# Altium PCB draft2.PcbDoc (part 1 of 2)
Units mm, origin at the board's own origin, x right, y up, seen from the top; angles counter-clockwise.
Board outline 152.4 x 101.6 mm, 2 copper layers (Top Layer, Bottom Layer); 122 components, 129 nets, 542 pads, 17 vias.
Unrouted connection lines stored in the file: 308.
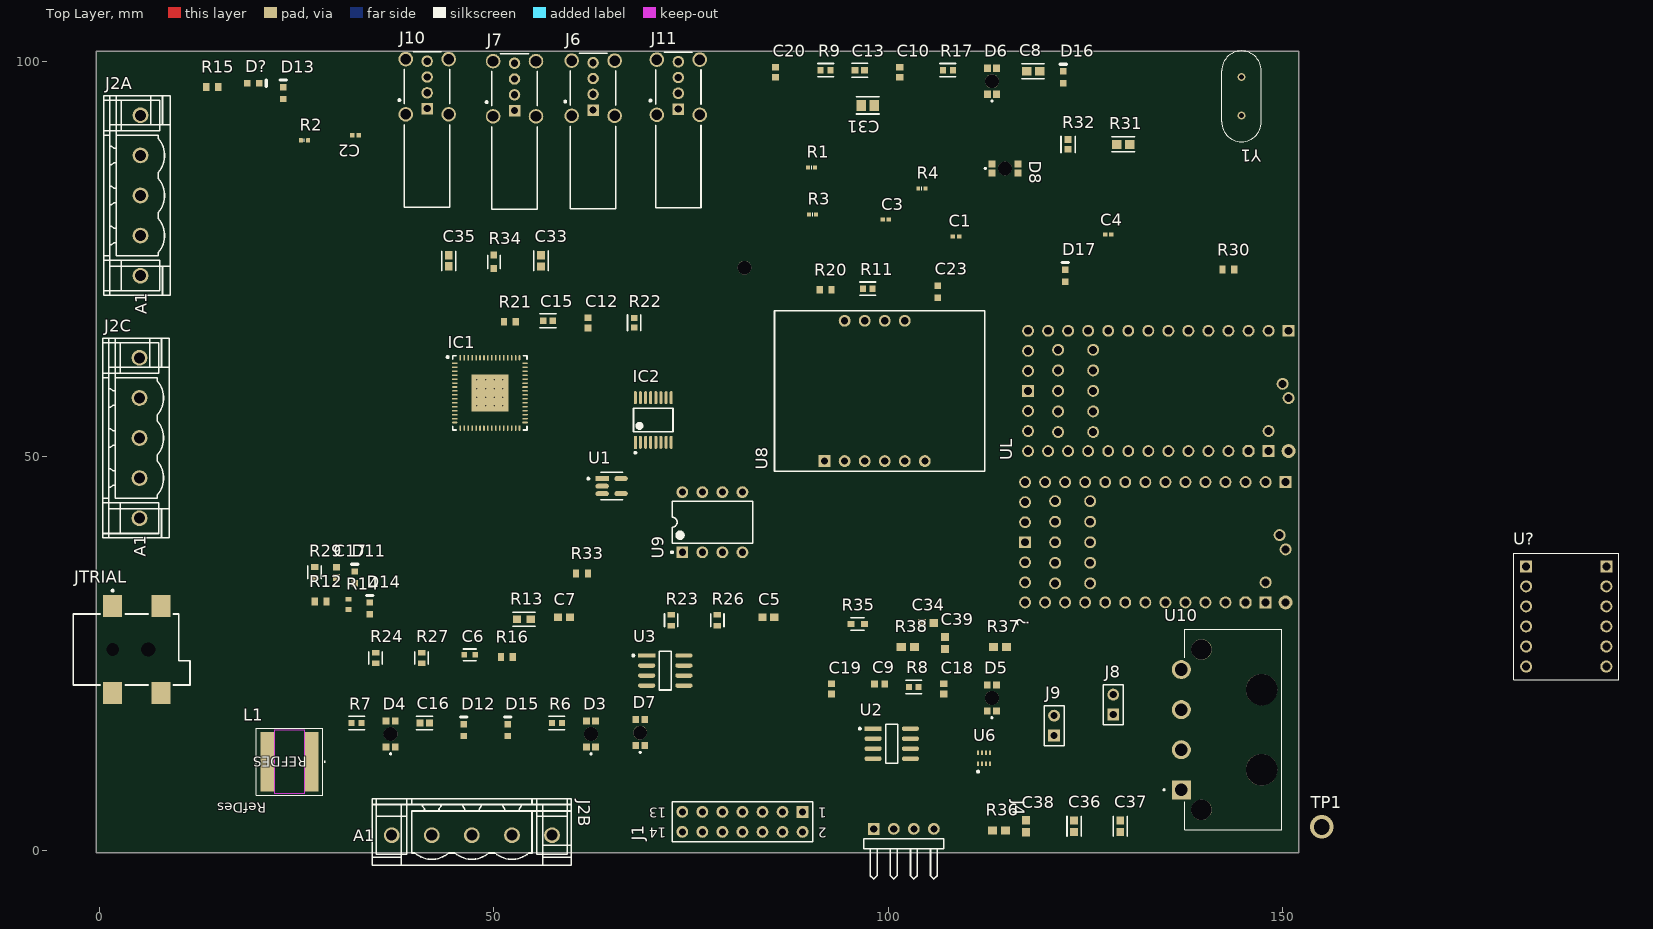
[diagram p0: Top Layer view]
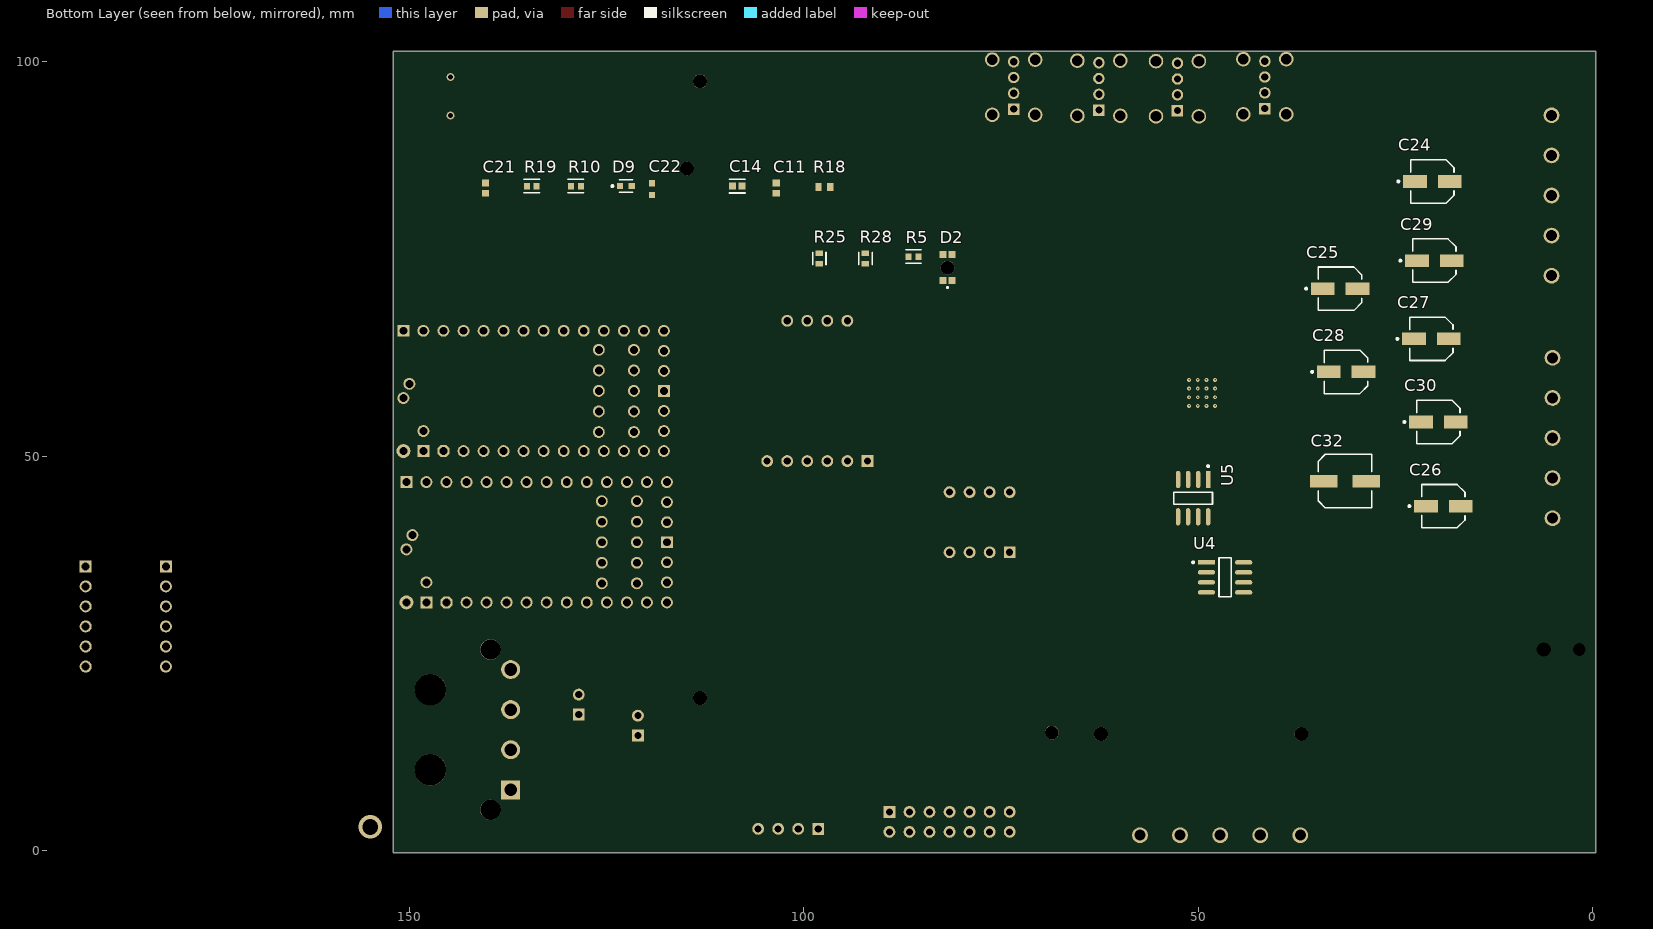
[diagram p1: Bottom Layer view, seen from below]

## Layer stack, top to bottom
Top Solder: solder mask 0.0102, Solder Resist, Dk 3.5
Top Layer: signal copper 0.0356
Dielectric 1: dielectric 0.32, FR-4, Dk 4.8
Bottom Layer: signal copper 0.0356
Bottom Solder: solder mask 0.0102, Solder Resist, Dk 3.5

## Board outline
-0.381,-0.254 152.019,-0.254 152.019,101.346 -0.381,101.346

## Design rules (kind name [scope] priority, off if disabled: settings)
Clearance [All] p1: gap=0.254 ignorepadtopadclearanceinfootprint=FALSE except(0.048: SMDPad-Region; 0.178: SMDPad-SMDPad)
PolygonConnect [All] p1: connectstyle=Relief reliefconductorwidth=0.254 reliefentries=4 polygonreliefangle="90 Angle" airgapwidth=0.254
RoutingVias [All] p1: holewidth=0.711 width=1.27 viastyle="Through Hole" minholewidth=0.711 minwidth=1.27 maxholewidth=0.711 maxwidth=1.27
SolderMaskExpansion [All] p1: expansion=0.102 istentingtop=FALSE
SupplyNets "Schematic Supply Nets_4" [InNet('+3.3')] p1: voltage=0.000
SupplyNets "Schematic Supply Nets" [InNet('GND')] p2: voltage=0.000
SupplyNets "Schematic Supply Nets_3" [InNet('12V')] p3: voltage=0.000
SupplyNets "Schematic Supply Nets_2" [InNet('5V')] p4: voltage=0.000
SupplyNets "Schematic Supply Nets_1" [InNet('5V_ESC')] p5: voltage=0.000
Width [All] p1: maxlimit=0.254 minlimit=0.254 preferedwidth=0.254
30 further rules are at their usual default settings.

## Classes and differential pairs
component class U_MSub: ? U?
component class "U_L Subsys1": UL
component class U_InterfaceBoard: C1 C2 C3 C4 J6 J7 J10 J11 R1 R2 R3 R4
component class "U_5ch Receiver": U10
component class Root: J1 J2A J2B J2C J4 JTRIAL
component class Designator: C5 C6 C7 C8 C9 C10 C11 C12 C13 C14 C15 C16 C17 C18 C19 C20 C21 C22 C23 C24 C25 C26 C27 C28 C29 C30 D2 D3 D4 D5 D6 D7 D8 D9 D11 D12 D13 D14 D15 D16 D? IC1 R5 R6 R7 R8 R9 R10 R11 R12 R13 R14 R15 R16 R17 R18 R19 R20 R21 R22 R23 R24 R25 R26 R27 R28 R29 U1 U2 U3 U4 U5 Y1
component class "5V Regulator": C33 C34 C35 C36 C37 C38 C39 L1 R34 R35 R36 R37 R38 U6

## Components (designator, comment, footprint, x,y, rotation, side; value= is the part's Value field where it differs from the comment)
? "Teensy 4.0 device including POGO pins for pins 24 - 33, but not yet pins for D+ and D-.  Symbol layout is what works for me and may not suite everyone... that can be added or additional symbols can be created to be used in a modilied davie name." TEENSY40 133.858,39.116 r180 top (schematic designator UM)
C1 "Capacitor 0.1 uF +/- 5% 16 V 0402" CAPC1005X56X25LL10T15 108.594,77.851 r0 top value=100nF
C2 "Capacitor 0.1 uF +/- 5% 16 V 0402" CAPC1005X56X25LL10T15 32.503,90.678 r180 top value=100nF
C3 "Capacitor 0.1 uF +/- 5% 16 V 0402" CAPC1005X56X25LL10T15 99.686,80.01 r0 top value=100nF
C4 "Capacitor 0.1 uF +/- 5% 16 V 0402" CAPC1005X56X25LL10T15 127.889,78.105 r0 top value=100nF
C5 "Capacitor 1 uF +/- 10% 16 V 0603" CAPC1608X94X35NL15T15 84.826,29.612 r0 top value=1µF
C6 "2.2u" FP-C1608-080-0_1-MFG 46.98,24.841 r0 top
C7 "Capacitor 1 uF +/- 10% 16 V 0603" CAPC1608X94X35NL15T15 58.918,29.612 r0 top value=1µF
C8 "1u" FP-0603-L_1_6_0_15-W_0_81-IPC_A 118.364,98.806 r0 top
C9 "0.1 u" CAPC1608X90X35LL15T15 98.923,21.158 r0 top
C10 "0.1 u" CAPC1608X90X35LL15T15 101.473,98.679 r90 top
C11 "0.1 u" CAPC1608X90X35LL15T15 103.495,83.998 r90 bottom
C12 "0.1 u" CAPC1608X90X35LL15T15 61.976,66.929 r90 top
C13 "1 u" FP-0603-L_1_6_0_15-W_0_8-IPC_C 96.393,98.933 r0 top
C14 "1 u" FP-0603-L_1_6_0_15-W_0_8-IPC_C 108.448,84.252 r180 bottom
C15 "1 u" FP-0603-L_1_6_0_15-W_0_8-IPC_C 56.896,67.183 r0 top
C16 "1 u" FP-0603-L_1_6_0_15-W_0_8-IPC_C 41.265,16.205 r0 top
C17 "0.1 u" CAPC1608X90X35LL15T15 30.099,35.306 r90 top
C18 "0.1 u" CAPC1608X90X35LL15T15 107.051,20.523 r90 top
C19 "0.1 u" CAPC1608X90X35LL15T15 92.827,20.523 r90 top
C20 "0.1 u" CAPC1608X90X35LL15T15 85.725,98.679 r90 top
C21 "0.1 u" CAPC1608X90X35LL15T15 140.325,83.998 r90 bottom
C22 "33pF" WCAP-CSGP_0603_L1.6W0.8H0.8_Reflow 119.243,83.871 r90 bottom
C23 "33pF" WCAP-CSGP_0603_L1.6W0.8H0.8_Reflow 106.299,70.866 r90 top
C24 "150uF" FP-OS-CON-SMT-B6-MFG 20.361,84.836 r180 bottom
C25 "150uF" FP-OS-CON-SMT-B6-MFG 32.045,71.247 r180 bottom
C26 "150uF" FP-OS-CON-SMT-B6-MFG 18.964,43.688 r180 bottom
C27 "150uF" FP-OS-CON-SMT-B6-MFG 20.488,64.897 r180 bottom
C28 "150uF" FP-OS-CON-SMT-B6-MFG 31.283,60.706 r180 bottom
C29 "150uF" FP-OS-CON-SMT-B6-MFG 20.107,74.803 r180 bottom
C30 "150uF" FP-OS-CON-SMT-B6-MFG 19.599,54.356 r180 bottom
C31 "GCM21BR71C155KA37L" FP-GCM21B-0_15-IPC_B 97.409,94.488 r180 top
C32 "UUD1A151MCL1GS" NIC-CAPA2-6.3X5.8_V 31.41,46.863 r180 bottom
C33 "22uF" FP-0603-L_1_6_0_2-W_0_8_0-IPC_B 56.007,74.779 r90 top
C34 "0.1 uF" CAPC1608X90X35NL15T15 105.029,28.888 r0 top
C35 "1uF" FP-0603-L_1_6_0_15-W_0_8-IPC_B 44.323,74.779 r90 top
C36 "22uF" FP-0603-L_1_6_0_2-W_0_8_0-IPC_B 123.571,3.13 r90 top
C37 "22uF" FP-0603-L_1_6_0_2-W_0_8_0-IPC_B 129.413,3.13 r90 top
C38 "10 pF" CAPC1608X90X35NL15T15 117.475,3.13 r90 top
C39 "6.8nF" CAPC1608X90X35NL15T15 107.188,26.348 r90 top
D2 "156125YV73000" "WL-SBRW_1205_reverse mount" 81.788,73.914 r90 bottom
D3 "156125YV73000" "WL-SBRW_1205_reverse mount" 62.347,14.808 r90 top
D4 "156125YV73000" "WL-SBRW_1205_reverse mount" 36.947,14.808 r90 top
D5 "156125YV73000" "WL-SBRW_1205_reverse mount" 113.147,19.38 r90 top
D6 "156125YV73000" "WL-SBRW_1205_reverse mount" 113.157,97.536 r90 top
D7 "156125YV73000" "WL-SBRW_1205_reverse mount" 68.58,14.986 r90 top
D8 "156125YV73000" "WL-SBRW_1205_reverse mount" 114.808,86.487 r0 top
D9 "RED" FP-SML-LX0603SIW-TR-MFG 122.545,84.252 r180 bottom
D11 "RED" LTST-C191KRKT_V 32.385,34.671 r90 top
D12 "RED" LTST-C191KRKT_V 46.218,15.316 r90 top
D13 "RED" LTST-C191KRKT_V 23.358,96.033 r90 top
D14 "RED" LTST-C191KRKT_V 34.29,30.734 r90 top
D15 "RED" LTST-C191KRKT_V 51.806,15.316 r90 top
D16 "RED" LTST-C191KRKT_V 122.174,98.044 r90 top
D17 "RED" LTST-C191KRKT_V 122.428,72.898 r90 top
D? "RED" LTST-C191KRKT_V 19.548,97.303 r0 top (schematic designator DX)
IC1 "USB2517-JZX" MCHP-QFN-64-4700X4700TP_L 49.53,58.039 r0 top
IC2 "74LVC157APW,118" FP-SOT403-1-IPC_B 70.231,54.61 r90 top
J1 "Header 7X2" HDR2X7 89.154,4.953 r180 top
J2A "1147920000" SL_5_08HC_180LF_03 4.826,83.058 r90 top
J2B "1147920000" SL_5_08HC_180LF_03 47.244,2.413 r0 top
J2C "1147920000" SL_5_08HC_180LF_03 4.699,52.324 r90 top
J4 "Header 4H" HDR1X4H 98.171,2.794 r0 top
J6 "73725-0110BLF" FCI-73725-0110BLF_V 62.611,96.655 r0 top
J7 "73725-0110BLF" FCI-73725-0110BLF_V 52.652,96.591 r0 top
J8 "Conn_01x02" HDR1X2 128.524,17.272 r90 top
J9 "Conn_01x02" HDR1X2 121.031,14.605 r90 top
J10 "73725-0110BLF" FCI-73725-0110BLF_V 41.582,96.845 r0 top
J11 "73725-0110BLF" FCI-73725-0110BLF_V 73.406,96.782 r0 top
JTRIAL "PJ-002AH-SMT-TR" CUI-PJ-002AH-4_V 4.123,25.527 r0 top
L1 "10uH" IND_TAIYO_NR8040_TAY 24.13,11.303 r180 top
R1 "Resistor 330R +/-5 % 0402 63 mW" RESC0402(1005)_L 90.297,86.614 r0 top value=330
R2 "Resistor 330R +/-5 % 0402 63 mW" RESC0402(1005)_L 26.035,90.043 r0 top value=330
R3 "Resistor 330R +/-5 % 0402 63 mW" RESC0402(1005)_L 90.424,80.645 r0 top value=330
R4 "Resistor 330R +/-5 % 0402 63 mW" RESC0402(1005)_L 104.267,83.947 r0 top value=330
R5 "330" FP-CRGCQ0603-IPC_C 86.106,75.311 r180 bottom value=330Ω
R6 "330" FP-CRGCQ0603-IPC_C 58.029,16.205 r0 top value=330Ω
R7 "330" FP-CRGCQ0603-IPC_C 32.629,16.205 r0 top value=330Ω
R8 "330" FP-CRGCQ0603-IPC_C 103.241,20.777 r0 top value=330Ω
R9 "330" FP-CRGCQ0603-IPC_C 92.075,98.933 r0 top value=330Ω
R10 "330" FP-CRGCQ0603-IPC_C 128.895,84.252 r180 bottom value=330Ω
R11 "330" FP-CRGCQ0603-IPC_C 97.409,71.247 r0 top value=330Ω
R12 "Resistor 10k +/-1% 0603 100 mW" RESC1608X55X25ML10T15 28.067,31.623 r0 top value=10k
R13 "1M" FP-AC0603-IPC_A 53.838,29.358 r0 top
R14 "12K 1%" RESC1608X55X25LL10T15 31.623,31.242 r90 top
R15 "Resistor 100k +/-1% 0603 100 mW" RESC1608X55X25ML10T15 14.341,96.795 r0 top value=100k
R16 "Resistor 100k +/-1% 0603 100 mW" RESC1608X55X25ML10T15 51.679,24.587 r0 top value=100k
R17 "10K" FP-CRGCQ0603-IPC_C 107.569,98.933 r0 top value=10KΩ
R18 "Resistor 10k +/-1% 0603 100 mW" RESC1608X55X25ML10T15 97.399,84.125 r180 bottom value=10k
R19 "330" FP-CRGCQ0603-IPC_C 134.483,84.252 r180 bottom value=330Ω
R20 "Resistor 10k +/-1% 0603 100 mW" RESC1608X55X25ML10T15 92.075,71.12 r0 top value=10k
R21 "100k" RESC1608X55X25ML10T15 52.07,67.056 r0 top
R22 "1M" FP-CRGP0603-IPC_C 67.818,66.929 r90 top
R23 "330 ohm" FP-MCT0603-MFG 72.507,29.231 r90 top
R24 "330 ohm" FP-MCT0603-MFG 35.042,24.46 r90 top
R25 "330 ohm" FP-MCT0603-MFG 98.044,75.057 r90 bottom
R26 "330 ohm" FP-MCT0603-MFG 78.349,29.231 r90 top
R27 "330 ohm" FP-MCT0603-MFG 40.884,24.46 r90 top
R28 "330 ohm" FP-MCT0603-MFG 92.202,75.057 r90 bottom
R29 "330 ohm" FP-MCT0603-MFG 27.305,35.306 r90 top
R30 "Resistor 1k +/-1% 0603 100 mW" RESC1608X55X25ML10T15 143.129,73.66 r0 top value=1k
R31 "ERA-3AEB183V" FP-ERA3A-IPC_A 129.794,89.535 r0 top
R32 "ERA3AEB202V" FP-ERA3A-IPC_C 122.809,89.535 r90 top
R33 "Resistor 100k +/-1% 0603 100 mW" RESC1608X55X25ML10T15 61.202,35.179 r0 top value=100k
R34 "20" FP-RT0603-MFG 50.038,74.652 r90 top value=604KΩ
R35 "604k" FP-RT0603-MFG 96.139,28.761 r0 top value=604KΩ
R36 "40.2k" RESC1609X55X30ML10T20 114.046,2.599 r0 top
R37 "15k" RESC1609X55X30ML10T20 114.173,25.84 r0 top
R38 "7.7k" RESC1609X55X30ML10T20 102.489,25.84 r0 top
TP1 "TestPoint" "Test Point" 154.94,3.048 r0 top
U1 "AP2112K-3.3TRG1" FP-SOT25-IPC_A 64.955,46.228 r0 top
U2 "MIC2026-1YM-TR" FP-SOICN-8LD-PL-1-IPC_B 100.457,13.589 r0 top
U3 "MIC2026-1YM-TR" FP-SOICN-8LD-PL-1-IPC_B 71.755,22.86 r0 top
U4 "MIC2026-1YM-TR" FP-SOICN-8LD-PL-1-IPC_B 46.62,34.671 r180 bottom
U5 "MIC2026-1YM-TR" FP-SOICN-8LD-PL-1-IPC_B 50.673,44.704 r270 bottom
U6 "MP-2393" MP-2393 111.395,11.046 r0 top
U8 "SI" "BNO055 Adafruit Breakout" 91.948,49.403 r90 top
U9 "LM358AP" P0008A 77.724,41.656 r90 top
U10 "TR" TE_641737-1 139.7,15.367 r90 top
U? "BOB-12009" CONV_BOB-12009 185.928,29.718 r0 top
UL "DEV-16771" TEENSY40 134.239,58.293 r180 top
Y1 "ABL-24.000MHZ-B2" XTAL_HC49P488W46L1150T500H350 144.78,95.631 r270 top

## Footprints (in the part's own frame and the unit in brackets; to place one, negate y for a bottom-side part, rotate by r counter-clockwise, add the part's x,y. Pads: shape width x height; smd on the part's side, far side on the other; paste and mask are expansions set on the pad)
"BNO055 Adafruit Breakout" [mm] "Made based off KiCAD footprint used previously- 0.1\" pitch and 0.7\" between rows"
  rect 1.5x1.5 hole 0.9: 1(0,0)
  round 1.5 hole 0.9: 2(0,-2.54) 3(0,-5.08) 4(0,-7.62) 5(0,-10.16) 6(0,-12.7) 7(17.78,-10.16) 8(17.78,-7.62) 9(17.78,-5.08) 10(17.78,-2.54)
  silkscreen extent -1.27,-20.32 19.05,6.35
CAPC1005X56X25LL10T15 [mm] "Chip Capacitor, 2-Leads, Body 1.10x0.60mm, IPC High Density"
  rect 0.58x0.54 smd: 1(-0.39,0) 2(0.39,0)
  body extent -0.55,-0.3 0.55,0.3, height 0.56
CAPC1608X90X35LL15T15 [mm] "Chip Capacitor, 2-Leads, Body 1.60x0.81mm, IPC High Density"
  rect 0.85x0.9 smd: 1(-0.65,0) 2(0.65,0)
  body extent -0.88,-0.48 0.87,0.48, height 0.9
CAPC1608X90X35NL15T15 [mm] "Chip Capacitor, 2-Leads, Body 1.60x0.81mm, IPC Medium Density"
  rect 1.05x1 smd: 1(-0.75,0) 2(0.75,0)
  body extent -0.88,-0.48 0.87,0.48, height 0.9
CAPC1608X94X35NL15T15 [mm] "Chip Capacitor, 2-Leads, Body 1.75x0.96mm, IPC Medium Density"
  rect 1.05x1 smd: 1(-0.75,0) 2(0.75,0)
  body extent -0.87,-0.48 0.87,0.48, height 0.94
CONV_BOB-12009 [mil]
  round 60 hole 40: GND_1(200,-50) GND_2(-200,-50) HV(200,50) HV2(200,150) HV3(200,-150) HV4(200,-250) LV(-200,50) LV2(-200,150) LV3(-200,-150) LV4(-200,-250)
  rect 60x60 / inner round 60 / far side rect 60x60 hole 40: HV1(200,250) LV1(-200,250)
  silkscreen extent -262,-316 262,316, body extent -262,-316 262,316, height 110
CUI-PJ-002AH-4_V [mm] "SMD, 4-Leads, Body 14.8x9 mm, Pitch 6.1mm"
  rect 2.4x2.8 smd: 1(-2.4,5.5) 1(3.7,5.5) 2(-2.4,-5.5) 3(3.7,-5.5)
  round 0 hole 1.6: MH1(-2.4,0)
  round 0 hole 1.8: MH2(2.1,0)
  silkscreen extent -7.4,-4.5 7.4,7.57, body extent -7.4,-6.3 7.4,6.3, height 11.2
FCI-73725-0110BLF_V [mm] "THD, 4-Leads, Body 19.7x5.76mm, Pitch 2mm"
  rect 1.45x1.45 hole 0.92: 1(0,-2.77)
  round 1.45 hole 0.92: 2(0,-0.77) 3(0,1.23) 4(0,3.23)
  round 1.85 hole 1.35: 5(-2.72,-3.5) 6(2.72,-3.5) 7(2.72,3.5) 8(-2.72,3.5)
  silkscreen extent -3.65,-15.26 2.88,4.44, body extent -2.88,-15.26 2.88,4.44, height 13.83
FP-0603-L_1_6_0_2-W_0_8_0-IPC_B [mm]
  rect 1.058x1.012 smd paste+0 mask+0: 1(-0.727,0) 2(0.727,0)
  silkscreen extent -1.26,-0.91 1.26,0.91, body extent -1.51,-0.76 1.51,0.76, height 0.25
FP-0603-L_1_6_0_15-W_0_8-IPC_B [mm]
  rect 1.058x0.962 smd paste+0 mask+0: 1(-0.702,0) 2(0.702,0)
  silkscreen extent -1.23,-0.88 1.23,0.88, body extent -1.48,-0.73 1.48,0.73, height 0.25
FP-0603-L_1_6_0_15-W_0_8-IPC_C [mm]
  rect 0.858x0.862 smd paste+0 mask+0: 1(-0.602,0) 2(0.602,0)
  silkscreen extent -1.03,-0.87 1.03,0.87, body extent -1.13,-0.58 1.13,0.58, height 0.25
FP-0603-L_1_6_0_15-W_0_81-IPC_A [mil]
  rect 47.5x42.06 smd paste+0 mask+0: 1(-32.51,0) 2(32.51,0)
  silkscreen extent -56,-37 56,37, body extent -76,-41 76,41, height 10
FP-AC0603-IPC_A [mm]
  rect 1.059x1.012 smd paste+0 mask+0: 1(-0.877,0) 2(0.877,0)
  silkscreen extent -1.41,-0.91 1.41,0.91, body extent -1.91,-1.01 1.91,1.01, height 0.25
FP-C1608-080-0_1-MFG [mm]
  rect 0.7x0.7 smd paste+0 mask+0: 1(-0.7,0) 2(0.7,0)
  silkscreen extent -0.8,-0.75 0.8,0.75, body extent -1.15,-0.55 1.15,0.55, height 0.25
FP-CRGCQ0603-IPC_C [mm]
  rect 0.758x0.812 smd paste+0 mask+0: 1(-0.627,0) 2(0.627,0)
  silkscreen extent -1.01,-0.85 1.01,0.85, body extent -0.8,-0.4 0.8,0.4, height 0.55
FP-CRGP0603-IPC_C [mm]
  rect 0.758x0.812 smd paste+0 mask+0: 1(-0.627,0) 2(0.627,0)
  silkscreen extent -1.01,-0.85 1.01,0.85, body extent -1.11,-0.55 1.11,0.55, height 0.25
FP-ERA3A-IPC_A [mm]
  rect 1.255x1.106 smd paste+0 mask+0: 1(-0.826,0) 2(0.826,0)
  silkscreen extent -1.45,-0.95 1.45,0.95, body extent -1.95,-1.05 1.95,1.05, height 0.25
FP-ERA3A-IPC_C [mm]
  rect 0.855x0.906 smd paste+0 mask+0: 1(-0.626,0) 2(0.626,0)
  silkscreen extent -1.05,-0.9 1.05,0.9, body extent -1.15,-0.6 1.15,0.6, height 0.25
FP-GCM21B-0_15-IPC_B [mm]
  rect 1.206x1.408 smd paste+0 mask+0: 1(-0.826,0) 2(0.826,0)
  silkscreen extent -1.43,-1.1 1.43,1.1, body extent -1.68,-0.95 1.68,0.95, height 0.25
FP-MCT0603-MFG [mm]
  rect 0.7x0.95 smd paste+0 mask+0: 1(-0.675,0) 2(0.675,0)
  silkscreen extent -0.8,-0.85 0.8,0.85, body extent -1.12,-0.58 1.12,0.58, height 0.25
FP-OS-CON-SMT-B6-MFG [mm]
  rect 3x1.6 smd paste+0 mask+0: 1(-2.2,0) 2(2.2,0)
  silkscreen extent -4.43,-2.75 2.75,2.75, body extent -3,-2.65 3,2.65, height 6
FP-RT0603-MFG [mm]
  rect 0.9x0.8 smd paste+0 mask+0: 1(-0.85,0) 2(0.85,0)
  silkscreen extent -0.85,-0.81 0.86,0.8, body extent -1.4,-0.55 1.4,0.55, height 0.25
FP-SML-LX0603SIW-TR-MFG [mm]
  rect 0.8x0.8 smd paste+0 mask+0: 1(-0.75,0) 2(0.75,0)
  silkscreen extent -1.85,-0.8 0.86,0.8, body extent -0.8,-0.4 0.8,0.4, height 0.73
FP-SOICN-8LD-PL-1-IPC_B [mm]
  rect 2.184x0.567 smd paste+0 mask+0: 1(-2.361,1.905)
  rrect100% 2.184x0.567 smd paste+0 mask+0: 2(-2.361,0.635) 3(-2.361,-0.635) 4(-2.361,-1.905) 5(2.361,-1.905) 6(2.361,-0.635) 7(2.361,0.635) 8(2.361,1.905)
  silkscreen extent -4.17,-2.46 0.77,2.46, body extent -3.7,-2.72 3.7,2.72, height 0.25
FP-SOT25-IPC_A [mm]
  rect 1.707x0.616 smd paste+0 mask+0: 1(-1.201,0.95)
  rrect100% 1.707x0.616 smd paste+0 mask+0: 2(-1.201,0) 3(-1.201,-0.95) 4(1.201,-0.95) 5(1.201,0.95)
  silkscreen extent -3.08,-1.75 1.4,1.75, body extent -2.55,-2 2.55,2, height 0.25
FP-SOT403-1-IPC_B [mm]
  rect 1.655x0.381 smd paste+0 mask+0: 1(-2.825,2.275)
  rrect100% 1.655x0.381 smd paste+0 mask+0: 2(-2.825,1.625) 3(-2.825,0.975) 4(-2.825,0.325) 5(-2.825,-0.325) 6(-2.825,-0.975) 7(-2.825,-1.625) 8(-2.825,-2.275) 9(2.825,-2.275) 10(2.825,-1.625) 11(2.825,-0.975) 12(2.825,-0.325) 13(2.825,0.325) 14(2.825,0.975) 15(2.825,1.625) 16(2.825,2.275)
  silkscreen extent -4.28,-2.5 1.5,2.5, body extent -3.9,-2.75 3.9,2.75, height 0.25
HDR1X2 [mm] "Connector; Header; 2 Position"
  rect 1.5x1.5 hole 0.9: 1(0,0)
  round 1.5 hole 0.9: 2(2.54,0)
  silkscreen extent -1.27,-1.27 3.81,1.27
HDR1X4H [mm] "Connector; Header; 4 Position; Right Angle"
  rect 1.5x1.5 hole 0.9: 1(0,0)
  round 1.5 hole 0.9: 2(2.54,0) 3(5.08,0) 4(7.62,0)
  silkscreen extent -1.27,-6.35 8.89,-1.27
HDR2X7 [mm] "Connector; Header; 7x2 Position"
  rect 1.5x1.5 hole 0.9: 1(0,0)
  round 1.5 hole 0.9: 2(0,2.54) 3(2.54,0) 4(2.54,2.54) 5(5.08,0) 6(5.08,2.54) 7(7.62,0) 8(7.62,2.54) 9(10.16,0) 10(10.16,2.54) 11(12.7,0) 12(12.7,2.54) 13(15.24,0) 14(15.24,2.54)
  silkscreen extent -1.27,-1.27 16.51,3.81
IND_TAIYO_NR8040_TAY [mil]
  rect 70.5x295 smd paste+0 mask+0: 1(-110.25,0) 2(110.25,0)
  Top Layer keep-out region: -73,-159.5 -73,159.5 73,159.5 73,-159.5
  silkscreen extent -178,-167 167,167, body extent -161,-162 161,162, height 165
LTST-C191KRKT_V [mm] "SMD, 2-Leads, Body 1.6x0.8mm"
  rect 0.8x0.8 smd: 1(-0.75,0) 2(0.75,0)
  silkscreen extent 1.65,-0.4 1.65,0.4, body extent -0.8,-0.4 0.8,0.4, height 0.9
MCHP-QFN-64-4700X4700TP_L [mm] "QFN, 64-Leads, Body 9.1x9.1mm, Pitch 0.5mm, Thermal Pad 4.7x4.7mm, IPC High Density"
  oval 0.7x0.2 smd: 1(-4.45,3.75) 2(-4.45,3.25) 3(-4.45,2.75) 4(-4.45,2.25) 5(-4.45,1.75) 6(-4.45,1.25) 7(-4.45,0.75) 8(-4.45,0.25) 9(-4.45,-0.25) 10(-4.45,-0.75) 11(-4.45,-1.25) 12(-4.45,-1.75) 13(-4.45,-2.25) 14(-4.45,-2.75) 15(-4.45,-3.25) 16(-4.45,-3.75) 33(4.45,-3.75) 34(4.45,-3.25) 35(4.45,-2.75) 36(4.45,-2.25) 37(4.45,-1.75) 38(4.45,-1.25) 39(4.45,-0.75) 40(4.45,-0.25) 41(4.45,0.25) 42(4.45,0.75) 43(4.45,1.25) 44(4.45,1.75) 45(4.45,2.25) 46(4.45,2.75) 47(4.45,3.25) 48(4.45,3.75)
  oval 0.2x0.7 smd: 17(-3.75,-4.45) 18(-3.25,-4.45) 19(-2.75,-4.45) 20(-2.25,-4.45) 21(-1.75,-4.45) 22(-1.25,-4.45) 23(-0.75,-4.45) 24(-0.25,-4.45) 25(0.25,-4.45) 26(0.75,-4.45) 27(1.25,-4.45) 28(1.75,-4.45) 29(2.25,-4.45) 30(2.75,-4.45) 31(3.25,-4.45) 32(3.75,-4.45) 49(3.75,4.45) 50(3.25,4.45) 51(2.75,4.45) 52(2.25,4.45) 53(1.75,4.45) 54(1.25,4.45) 55(0.75,4.45) 56(0.25,4.45) 57(-0.25,4.45) 58(-0.75,4.45) 59(-1.25,4.45) 60(-1.75,4.45) 61(-2.25,4.45) 62(-2.75,4.45) 63(-3.25,4.45) 64(-3.75,4.45)
  rect 4.7x4.7 smd: 65(0,0)
  silkscreen extent -5.47,-4.7 4.7,4.7, body extent -4.55,-4.55 4.55,4.55, height 1
MP-2393 [mm] "https://www.monolithicpower.com/en/documentview/productdocument/index/version/2/document_type/Datasheet/lang/en/sku/MP2393GTL-Z/document_id/4270/"
  rect 0.25x0.6 smd: 1(0,0) 2(0.5,0) 3(1,0) 4(1.5,0) 5(1.5,1.4) 6(1,1.4) 7(0.5,1.4) 8(0,1.4)
  silkscreen extent -0.12,-1.12 0.13,-0.88
NIC-CAPA2-6.3X5.8_V [mm] "Aluminum Electrolytic Capacitor, Diameter 6.3mm, Height 6.1mm, Pitch 5.4mm"
  rect 3.5x1.6 smd: 1(-2.7,0) 2(2.7,0)
  silkscreen extent -3.4,-3.4 3.4,3.4, body extent -3.15,-3.15 3.15,3.15, height 6.1
P0008A [mm] "DIP, 8-Leads, Body 10.15x6.6mm, Pitch 2.54mm"
  rect 1.5x1.5 hole 0.9: 1(-3.81,3.81)
  round 1.5 hole 0.9: 2(-3.81,1.27) 3(-3.81,-1.27) 4(-3.81,-3.81) 5(3.81,-3.81) 6(3.81,-1.27) 7(3.81,1.27) 8(3.81,3.81)
  silkscreen extent -3.93,-5.1 2.65,5.23, body extent -3.95,-5.07 3.95,5.07, height 5.08
RESC0402(1005)_L [mm] "Chip Resistor, Body 1.0x0.5mm, IPC High Density"
  rrect25% 0.5x0.55 smd: 1(-0.45,0) 2(0.45,0)
  silkscreen extent 0,-0.2 0,0.2, body extent -0.5,-0.25 0.5,0.25, height 0.3
RESC1608X55X25LL10T15 [mm] "Chip Resistor, 2-Leads, Body 1.60x0.80mm, IPC High Density"
  rect 0.6x0.8 smd: 1(-0.65,0) 2(0.65,0)
  body extent -0.85,-0.45 0.85,0.45, height 0.55
RESC1608X55X25ML10T15 [mm] "Chip Resistor, 2-Leads, Body 1.70x0.90mm, IPC Low Density"
  rect 0.8x1 smd: 1(-0.75,0) 2(0.75,0)
  body extent -0.85,-0.45 0.85,0.45, height 0.55
RESC1609X55X30ML10T20 [mm] "Chip Resistor, 2-Leads, Body 1.60x0.85mm, IPC Low Density"
  rect 1.15x1.05 smd: 1(-0.825,0) 2(0.825,0)
  body extent -0.85,-0.48 0.85,0.48, height 0.55
SL_5_08HC_180LF_03 [mm] "OMNIMATE Signal - Serie BL/SL 5.08  SL 5.08HC/03/180LF 3.2"
  round 2 hole 1.4: 0(-10.16,-0.42) 0(10.16,-0.42) A1(-5.08,-0.42) A2(0,-0.42) A3(5.08,-0.42)
  silkscreen extent -12.62,-4.22 12.62,4.21, body extent -12.62,-4.22 12.62,4.21, height 12.01
TE_641737-1 [mil]
  rect 94.5x94.5 / inner round 94.5 / far side rect 94.5x94.5 hole 63: 1(-300,100)
  round 94.5 hole 63: 2(-100,100) 3(100,100) 4(300,100)
  round 102 hole 102 unplated: ""(-400,0) ""(400,0)
  round 157 hole 157 unplated: ""(-200,-300) ""(200,-300)
  silkscreen extent -500,-401 500,191, body extent -500,-431 500,131, height 345
TEENSY40 [mm]
  round 1.508 hole 1: 0-RX1(-13.97,-7.62) 1-TX1(-11.43,-7.62) 2-OUT2(-8.89,-7.62) 3-LRCLK2(-6.35,-7.62) 3V3-2(16.51,-2.54) 4-BCLK2(-3.81,-7.62) 5-IN2(-1.27,-7.62) 6-OUT1D(1.27,-7.62) 7-RX2/OUT1A(3.81,-7.62) 8-TX2/IN1(6.35,-7.62) 9-OUT1C(8.89,-7.62) 10-CS/MQSR(11.43,-7.62) 11-MOSI/CTX1(13.97,-7.62) 12-MIO/MQSL(16.51,-7.62) 13-SCK/CRX1/LED(16.51,7.62) 14-A0/TX3/S-PFI_OUT(13.97,7.62) 15-A1/RX3/S-PDIF_IN(11.43,7.62) 16-A2/RX4/SCL1(8.89,7.62) 17-A3/TX4/SDA1(6.35,7.62) 18-A4/SDA0(3.81,7.62) 19-A5/SCL0(1.27,7.62) 20-A6/TX5/LRCLK1(-1.27,7.62) 21-A7/RX5/BCLK1(-3.81,7.62) 22-A8/CTX1(-6.35,7.62) 23-A9/CRX1/CCLK1(-8.89,7.62) 24-A10/TX6/SCL2(12.7,5.207) 25-A11/SDA2(8.255,5.207) 26-A12/MOSI1(12.7,2.604) 27-A13/SCK1(8.255,2.604) 28-RX7(12.7,0) 29-TX7(8.255,0) 30-CRX3(12.7,-2.603) 31-CTX3(8.255,-2.603) 32-OUTB1(12.7,-5.207) 33-MCLK2(8.255,-5.207) D+(-15.75,-0.9) D-(-16.51,0.9) ON/OFF(16.51,5.08) PROGRAM(16.51,2.54) VBAT(16.51,-5.08) VUSB(-13.97,5.08)
  oct 1.508x1.508 / inner round 1.393 / far side oct 1.508x1.508 hole 1: 3V3-1(-11.43,7.62)
  rect 1.508x1.508 / inner round 1.393 / far side rect 1.508x1.508 hole 1: GND1(-16.51,-7.62) GND2(16.51,0) GND3(-13.97,7.62)
  round 1.778 hole 1: VIN(-16.51,7.62)
"Test Point" [mm] "Used same size as kicad - 3mm, 2mm hole"
WCAP-CSGP_0603_L1.6W0.8H0.8_Reflow [mm] "Ceramic Capacitors, body 1.6x0.8mm"
  rect 0.8x0.8 smd: 1(-0.75,0) 2(0.75,0)
  body extent -0.8,-0.4 0.8,0.4, height 0.8
"WL-SBRW_1205_reverse mount" [mm] "SMD Bi-color Reverse mount Waterclear, body 3.2x1.2mm"
  rect 0.9x0.85 smd: 1(-1.65,0.575) 2(-1.65,-0.575) 3(1.65,-0.575) 4(1.65,0.575)
  round 1.75 hole 1.75 unplated: MH1(0,0)
  silkscreen extent -2.6,-0.1 -2.4,0.1, body extent -1.6,-0.6 1.6,0.6, height 0.28
XTAL_HC49P488W46L1150T500H350 [mm]
  round 1.007 hole 0.657: 1(-2.44,0) 2(2.44,0)
  silkscreen extent -5.75,-2.5 5.75,2.5

## Part data
? UL: library part TEENSY40, DeviceSetName=TEENSY40, GateName_1=G$1, LibraryName=TEENSYV1, Package=TEENSY40, SymbolName_1=TEENSY40
C1 C2 C3 C4: library part CMP-001-00001-6, "Chip Capacitor, 0.1 uF, +/- 5%, 16 V, 0402 (1005 Metric)", Capacitor Type=Ceramic, Case/Package=0402, Max Operating Temperature=125°C, Min Operating Temperature=-55°C, Tolerance=5%, Voltage Rating=16V, Mounting Technology=SM, Pins=2, RoHS Compliant=True
C5 C7: library part CMP-001-00003-6, "Chip Capacitor, 1 uF, +/- 10%, 16 V, 0603 (1608 Metric)", Capacitor Type=Ceramic, Case/Package=0603, Max Operating Temperature=125°C, Min Operating Temperature=-55°C, Tolerance=10%, Voltage Rating=16V, Mounting Technology=SM, Pins=2, RoHS Compliant=True
C6: library part CMP-08246-003049-1, "Multilayer Ceramic Capacitors 2.2μF ±10% 25V X5R SMD 0603", Capacitance=2.2uF, Case Code (Imperial)=0603, Case Code (Metric)=1608, Dielectric=X5R, Dielectric Material=Ceramic, Max Operating Temperature=85°C, Min Operating Temperature=-55°C, Package Quantity=4000, Tolerance=10%, Voltage Rating=25V, Case/Package=0603, Depth=0.8mm, Height=0.8mm, Lead Free="Lead Free", Length=1.6mm, Mount="Surface Mount", Packaging="Tape and Reel", Radiation Hardening=No, REACH SVHC="No SVHC", Resistor Type=Ceramic, RoHS Compliant=Yes, Series=C, Termination=SMD/SMT, Thickness=0.035inch, Voltage Rating (DC)=25V, Weight=7.1E-05oz, Width=0.031inch
C8: library part CMP-2006-04474-2, "General Purpose Ceramic Capacitor, 0603, 1uF, 10%, X5R, 15%, 6.3V", Capacitance=1uF, Case Code (Imperial)=0603, Case Code (Metric)=1608, Dielectric=X5R, Insulation Resistance=100GR, Max Operating Temperature=85°C, Min Operating Temperature=-55°C, Package Quantity=1, Tolerance=10%, Voltage=6.3V, Case/Package=0603, Construction=Flat, Contact Plating=Tin, Depth=0.81mm, Dissipation Factor=5%, Height=0.9mm, Lead Free="Lead Free", Length=1.6mm, Mount="Surface Mount", Number of Pins=2, Packaging="Tape and Reel", Radiation Hardening=No, REACH SVHC="No SVHC", RoHS Compliant=Yes, Series=-, Termination=SMD/SMT, Thickness=0.035inch, Voltage Rating=6.3V, Voltage Rating (DC)=6.3V, Width=0.032inch
C9 C10 C11 C12 C17 C18 C19 C20 C21: library part CMP-2006-04390-1, "06035C104KAT4A", Manufacturer="AVX Interconnect / Elco", Part Number=06035C104KAT4A
C13 C14 C15 C16: library part CMP-2000-07531-4, "Ceramic Capacitor General Use 1uF ±10% 50V X7R 0603 / UMK107AB7105KA-T", Capacitance=1uF, Case Code (Imperial)=0603, Case Code (Metric)=1608, Dielectric=X7R, Max Operating Temperature=125°C, Min Operating Temperature=-55°C, Package Quantity=1, Tolerance=10%, Voltage Rating=50V, Case/Package=0603, Construction=Flat, Depth=0.8mm, Halogen Free="Halogen Free", Height=0.8mm, Length=1.6mm, Mount="Surface Mount", Packaging="Tape and Reel", Radiation Hardening=No, RoHS Compliant=Yes, Series=M, Termination=SMD/SMT, Thickness=0.037inch, Voltage Rating (DC)=50V, Width=0.031inch
C22 C23: library part CMP-03913-65419545-2, "Ceramic Capacitor 33pF, 16VDC, 0603, ±5 %", Case Code (Imperial)=0603, Case Code (Metric)=1608, Insulation Resistance=10GΩ, Max Operating Temperature=125°C, Min Operating Temperature=-55°C, Tolerance=5%, Voltage Rating=16V, Capacitance=33pF, Case/Package=0603, Height=800µm, Length=1.6mm, Mount="Surface Mount", Packaging="Cut Tape", RoHS=Compliant, Thickness=863.6µm, Voltage Rating (DC)=16V, Width=800µm
C24 C25 C26 C27 C28 C29 C30: library part CMP-05428-000017-2, "Conductive Polymer Aluminum Solid Capacitors (OS-CON) 150uF ±20% 6.3V", Case/Package=Radial, ESR (Equivalent Series Resistance)=12mR, Leakage Current=500uA, Max Operating Temperature=105°C, Min Operating Temperature=-55°C, Package Quantity=1500, Ripple Current=3.52A, Tolerance=20%, Voltage=6.3V, Capacitance=150uF, Diameter=5mm, Dissipation Factor=12%, Height=5.9mm, Height - Seated (Max)=0.236inch, Lead Free="Lead Free", Length=5.9mm, Life (Hours)=2000Hour, Mount="Surface Mount", Number of Pins=6, Packaging="Tape and Reel", Polarity=Polar, REACH SVHC="No SVHC", Ripple Current (AC)=3.52A, RoHS Compliant=Yes, Series="OS-CON™, SVPE", Termination=SMD/SMT, Voltage Rating=6.3V, Voltage Rating (DC)=6.3V
C31: library part CMP-2007-03337-2, "Ceramic Capacitor for Automotive 1.5uF ±10% 16VDC X7R 0805 Embossed T/R", Capacitance=1.5uF, Case Code (Imperial)=0805, Case Code (Metric)=2012, Dielectric=X7R, Max Operating Temperature=125°C, Min Operating Temperature=-55°C, Package Quantity=3000, Ratings=AEC-Q200, Tolerance=10%, Voltage Rating=16V, Case/Package=0805, Depth=1.25mm, Height=1.25mm, Length=2mm, Mount="Surface Mount", Packaging="Tape and Reel", Radiation Hardening=No, Termination=SMD/SMT, Thickness=0.055inch, Voltage Rating (DC)=16V, Width=0.049inch
C32: library part CMP-0687-00052-1, "Aluminum Electrolytic Capacitor, UD Series, Low Impedance, 150 uF, 10 V, + / - 20%, -55 to 105 degC, Chip Type, 6.3 x 5.8 mm D x L, Pb-Free, Reel", Manufacturer=Nichicon, Rated Capacitance="150 uF", Rated Ripple Current (at 100kHz)="230 mA", Rated Voltage="10 V", Tolerance Rated Capacitance="-20 to 20%", ComponentLink1Description="Manufacturer URL", ComponentLink1URL=http://www.nichicon.co.jp/, ComponentLink2Description=Datasheet, ComponentLink2URL=http://products.nichicon.co.jp/en/pdf/XJA043/e-ud.pdf, ComponentLink3Description="Package Specification", ComponentLink3URL=http://products.nichicon.co.jp/en/pdf/XJA043/e-ud.pdf, DatasheetVersion=08/2012, Diameter="6.3 mm", Endurance Time="2000 h", Impedance="0.44 Ohm", Length="5.8 mm", Mounting Technology="Surface Mount", PackageDescription="2-Pin Surface Mount Device, Diameter 6.3 mm, Height 5.8 mm, Pitch 5.4 mm", PackageReference=CAPAE-D6.3H5.8, Packing="Dia382mm Reel", PartNumber=UUD1A151MCL1GS, RoHS=TRUE
C33 C36 C37: library part CMP-14477-000010-3, "0603", Case Code (Metric)=1608, Max Operating Temperature=85°C, Min Operating Temperature=-55°C, Tolerance=20%, Voltage Rating=10V, Capacitance=22uF, Case Code (Imperial)=0603, Case/Package=0603, Mount="Surface Mount", Packaging="Cut Tape", RoHS Compliant=Yes
C34 C38 C39: library part CMP-2006-02157-1, "0603 (1608 metric)", Manufacturer="AVX Interconnect / Elco", Part Number=LD033C104KAB2A
C35: library part CMP-14477-003841-2, "None", Case/Package=0603, Max Operating Temperature=125°C, Min Operating Temperature=-55°C, Ratings=AEC-Q200, Tolerance=20%, Voltage Rating=25V, Capacitance=1uF, Length=0.063inch, Mount="Surface Mount", Packaging="Tape and Reel", RoHS Compliant=Yes, Thickness=0.037inch, Width=0.031inch
D2 D3 D4 D5 D6 D7 D8: library part CMP-03913-90235601-1, "156125YV73000 Dual Color LED, Yellow/bright Green, Water Clear, 1.2mm", Forward Current=40mA, Forward Voltage=2V, Max Operating Temperature=85°C, Max Reverse Voltage (DC)=5V, Min Operating Temperature=-40°C, Dominant Wavelength=571nm, Height=800µm, Length=3.2mm, Luminous Intensity=50mcd, NexarPartId=90235601, Packaging="Tape and Reel", Peak Wavelength=573nm, RoHS=Compliant, Viewing Angle=120°, Width=1.2mm
D9: library part CMP-57192-000009-1, "LED RED DIFFUSED SMD", Case Code (Imperial)=0603, Case Code (Metric)=1608, Color=Red, Forward Current=20mA, Forward Voltage=2V, Lens Color=White, Max Operating Temperature=85°C, Min Operating Temperature=-25°C, Package Quantity=1, Power Rating=50mW, Approvals=UL, Case/Package=0603, Dominant Wavelength=636nm, Height=0.6mm, Illumination Color=Red, Lead Free="Lead Free", Length=1.6mm, Lens Style=Diffused, Lens Transparency=Diffused, Luminous Intensity=60mcd, Moisture Sensitivity Level=2, Mount="Surface Mount", Number of LEDs=1, Number of Pins=2, Packaging="Tape and Reel", REACH SVHC="No SVHC", RoHS Compliant=Yes, Test Current=20mA, Viewing Angle=140°, Wavelength=636nm, Width=0.8mm
D11 D12 D13 D14 D15 D16 D17 D?: library part CMP-007-00024-2, "LED Uni-Color Red, 62.5 mW, 25 mA, -30 to 85 degC, 2-Pin SMD, RoHS, Tape and Reel", Case/Package=0603, Colour=Red, Forward Current=20mA, Forward Voltage=2V, Manufacturer=Lite-On, Max Operating Temperature=85°C, Min Operating Temperature=-55°C, Package Description="2-Pin Surface Mount Device, Body 1.6 x 0.8 mm", Package Quantity=3000, Package Reference=C191KRKT, Power=75mW, Datasheet URL=http://optoelectronics.liteon.com/upload/download/DS-22-99-0151/S_110_LTST-C190KRKT.pdf, Datasheet Version="Rev. F, 05/2013", Illumination Colour=Red, Lens Style=Diffused, Luminous Intensity=54mcd, Manufacturer URL=http://www.us.liteon.com/, Mounting Technology=SM, Nominal Vf=2V, Packaging=TapeandReel, Pins=2, RoHS Compliant=True, Viewing Angle=130degrees
IC1: library part CMP-0186-00330-1, "USB 2.0 Hi-Speed 7-Port Hub Controller, 3 to 3.6 V, 0 to 70 degC, 64-Pin QFN, RoHS, Tape and Reel", Manufacturer=Microchip, Op Voltage="3.3 V", Operating Temperature="0 to 70 degC", Voltage Regulator="1.8 V", ComponentLink1Description="Manufacturer URL", ComponentLink1URL=http://www.microchip.com/, ComponentLink2Description=Datasheet, ComponentLink2URL=http://ww1.microchip.com/downloads/en/DeviceDoc/2517.pdf, ComponentLink3Description="Package Specification", ComponentLink3URL=http://ww1.microchip.com/downloads/en/DeviceDoc/2517.pdf, DatasheetVersion="Rev. 2.8", Downstream Ports=7, MGMT I/F=I2C, Mounting Technology="Surface Mount", MultiTRAK Tech=TRUE, PackageDescription="64-Pin Plastic Quad Flat No Lead Package, Body 9 x 9 mm, Pitch 0.5 mm", PackageReference=QFN-64, Packing=TRAY, PartNumber=USB2517-JZX, RoHS=TRUE, Upstream Port="USB 2.0", USB Speed="High Speed"
IC2: library part CMP-14348-000002-1, "IC QUAD 2-IN MUX 16-TSSOP"
J1: library part CMP-002-00362-2, "Header, 7-Pin, Dual row", Component Type=Standard, Design Item ID="Header 7X2", LatestRevisionDate=17-Jul-2002, LatestRevisionNote="Re-released for DXP Platform.", Pins=14, Publisher="Altium Limited", Source="Miscellaneous Connectors.SchLib"
J2A J2B J2C: library part CMP-1559-01007-1, "OMNIMATE Signal - series BL/SL 5.08", Colour=Orange, Manufacturer=Weidmueller, Rated_current_use_group_B_UL_1059="16 A", Rated_voltage_for_surge_voltage_class_pollution_degree_II_2="400 V", Rated_voltage_use_group_B_UL_1059="300 V", UL_94_flammability_rating=V-0, ComponentLink1Description="Manufacturer URL", ComponentLink1URL=http://www.weidmueller.com/, ComponentLink2Description="URL Link1", ComponentLink2URL=http://catalog.weidmueller.com/catalog/Start.do?localeId=en&ObjectID=1147920000, Contact_material=Cu-Leg, Contact_surface=tinned, Insulating_material="PA GF", Mounting_onto_the_PCB="Solder connection", No_of_poles=3, Outgoing_elbow=180°, PackageReference=SL_5_08HC_180LF_03, Packaging=Box, PartNumber=1147920000, Pitch_inch="0.2 inch", Pitch_mm="5.08 mm", Qty="100 PCS", Revision=V1, Short_text_for_material="SL 5.08HC/03/180LF 3.2SN OR BX", Side_termination_characteristic="Solder flange", Solder_pin_length_mm="3.2 mm"
J4: "Header, 4-Pin, Right Angle", LatestRevisionDate=17-Jul-2002, LatestRevisionNote="Re-released for DXP Platform.", Publisher="Altium Limited"
J6 J7 J10 J11: library part CMP-2000-05674-1, "USB-A 2.0 Receptacle Connector, RA, -40 to 85 degC, 4-Pin THD, RoHS, Tube", Color=White, Flammability Rating=UL94V-0, Manufacturer=FCI, Package Description="4-Pin Throug Hole Device, Body 19.7 x 5.76 mm, Pitch 2 mm", Brand=FCI, Connector Type=USBTypeAReceptacle,Upright, Contact Material=CopperAlloy, Contact Plating=PalladiumNickelAlloy(GXT), Datasheet URL=http://portal.fciconnect.com/Comergent//fci/drawing/73725.pdf, Datasheet Version="Rev. AH, 09/2015", Factory Pack Quantity=30, Features=Singlestack,nobackshield,withoutsensorcontact, Gender=Female, Manufacturer URL=http://portal.fciconnect.com/, Mounting Angle=Right, Mounting Style=ThroughHole, Mounting Technology=ThroughHole, Number of Contacts=4, Number of Ports=1, Number of Positions=4, Number of Positions / Contacts=4, Package Reference=73725-0110BLF, Packaging=Tube, Product=USBTypeAConnectors, Product Category=USBConnectors, RoHS=Details, Series=USB, Shell Plating=Tin, Standard=USB2.0, Termination Style=SolderPin
JTRIAL: library part CMP-2000-06896-2, "DC Power Jack, Right Angle, -25 to 85 degC, 4-Pin 14.8 x 9 x 11 mm SMD, RoHS, Tape and Reel", Current Rating=5A, Flammability Rating=UL94V-0, Insulation Resistance=100MOhms, Manufacturer=CUIInc., Operating Temperature Range=-25Cto+85C, Package Description="4-Pin Surface Mount Device, Body 14.8 x 9 mm, Pitch 6.1 mm", Package Reference=PJ-002AH, Voltage Rating=24V, Brand=CUI, Connector Type=DCPowerJack, Contact Gender=Male, Contact Material=Brass, Contact Plating=Nickel, Datasheet URL=http://www.cui.com/product/resource/pj-002ah-smt.pdf, Datasheet Version="Rev. 1.03, 11/2012", Factory Pack Quantity=350, Housing Material=Polyamide(PA), Inside Contact Diameter=2mm, Manufacturer URL=http://www.cui.com/, Mounting Angle=Right, Mounting Style=SMD/SMT, Mounting Technology=SurfaceMount, Outside Contact Diameter=6.5mm, Packaging=Reel, PartNumber=PJ-002AH, Product=Jacks, Product Category=DCPowerConnectors, RoHS=True, Termination Style=SMD/SMT
L1: library part NR8040T100M, "No Description Available", Manufacturer_Name="TAIYO YUDEN", Copyright="Copyright (C) 2025 Ultra Librarian. All rights reserved.", Manufacturer_Part_Number=NR8040T100M
R1 R2 R3 R4: library part CMP-009-00132-3, "Chip Resistor, 330 Ohms, +/-5 %, 63 mW, -55 to 155 degC, 0402", Case/Package=0402, Max Operating Temperature=155°C, Min Operating Temperature=-55°C, Power=63mW, Tolerance=5%, Pins=2
R5 R6 R7 R8 R9 R10 R11 R19: library part CMP-03211-002147-1, "CRGCQ 0603 330R 5%", Ambient Temperature Range High=+70°C, Manufacturer="TE Connectivity", Manufacturer Part Number=CRGCQ0603J330R, Package=CRGCQ0603, Power Rating=0.1W, Resistance=330Ω, Temperature="-55°C to +155°C", Temperature Coefficient=±100ppm/°C, Temperature Range High=+155°C, Temperature Range Low=-55°C, Tolerance=0.05, Voltage Rating=75V, Category=Res, ComponentLink2Description=Datasheet, ComponentLink2URL=https://www.te.com/commerce/DocumentDelivery/DDEController?Action=showdoc&DocId=Data+Sheet%7F1773204-3%7F1%7Fpdf%7FEnglish%7FENG_DS_1773204-3_1.pdf%7F4-2176339-581, Composition="Thick Film", Device Class L1="Passive Components", Device Class L2=Resistors, Device Class L3="Chip SMD Resistors", Digikey Description="CRGCQ 0603 330R 5%", Height=0.55mm, Ipc Land Pattern Name=RESC16080X45, Lead Free=Yes, Mouser Description="Res General Purpose Thick Film 0603 330 Ohm 5% 1/10W ±100ppm/°C Molded Paper T/R", Octopart=https://octopart.com/crgcq0603j330r-te+connectivity-91018118, RoHS=TRUE, Series=CRGCQ
R12 R18 R20: library part CMP-009-00017-5, "Chip Resistor, 10 KOhm, +/- 1%, 01 W, -55 to 155 degC, 0603 (1608 Metric)", Case/Package=0603, Max Operating Temperature=155°C, Min Operating Temperature=-55°C, Power=100mW, Tolerance=1%, Voltage Rating=50V, Mounting Technology=SM, Pins=2, RoHS Compliant=True
R13: library part CMP-03412-038630-1, "RES 1MΩ 1.00% 0.1W 0603", Case/Package=0603, Resistance=1MR, Tolerance=1%, RoHS Compliant=Yes
R14: library part CMP-2000-04198-1, Manufacturer=Yageo, Part Number=RC0603FR-1312KL
R15 R16 R21 R33: library part CMP-009-00023-5, "Chip Resistor, 100 KOhm, +/- 1%, 0.1 W, -55 to 155 degC, 0603 (1608 Metric)", Case/Package=0603, Max Operating Temperature=155°C, Min Operating Temperature=-55°C, Power=100mW, Tolerance=1%, Voltage Rating=50V, Mounting Technology=SM, Pins=2, RoHS Compliant=True
R17: library part CMP-03211-009884-1, "CRGCQ 0603 10K 5%", Ambient Temperature Range High=+70°C, Manufacturer="TE Connectivity", Manufacturer Part Number=CRGCQ0603J10K, Package=CRGCQ0603, Power Rating=0.1W, Resistance=10KΩ, Temperature="-55°C to +155°C", Temperature Coefficient=±100ppm/°C, Temperature Range High=+155°C, Temperature Range Low=-55°C, Tolerance=0.05, Voltage Rating=75V, Category=Res, ComponentLink2Description=Datasheet, ComponentLink2URL=https://www.te.com/commerce/DocumentDelivery/DDEController?Action=showdoc&DocId=Data+Sheet%7F1773204-3%7F1%7Fpdf%7FEnglish%7FENG_DS_1773204-3_1.pdf%7F4-2176339-923, Composition="Thick Film", Device Class L1="Passive Components", Device Class L2=Resistors, Device Class L3="Chip SMD Resistors", Digikey Description="CRGCQ 0603 10K 5%", Height=0.55mm, Ipc Land Pattern Name=RESC16080X45, Lead Free=Yes, Mouser Description="Res Thick Film 0603 10K Ohm 5% 0.1W(1/10W) ±100ppm/C Pad SMD Automotive T/R", Octopart=https://octopart.com/crgcq0603j10k-te+connectivity-91018097, RoHS=TRUE, Series=CRGCQ
R22: library part CMP-03211-004384-3, "RES 1M OHM 1% 1/4W 0603", Case Code (Imperial)=0603, Case Code (Metric)=1608, Max Operating Temperature=155°C, Max Power Dissipation=250mW, Min Operating Temperature=-55°C, Resistance=1MR, Resistor Type="Thick Film", Temperature Coefficient=100ppm/°C, Tolerance=1%, Case/Package=0603, Number of Terminations=2, Packaging="Cut Tape", RoHS Compliant=Yes
R23 R24 R25 R26 R27 R28 R29: library part CMP-02407-004102-1, "RES SMD 100 OHM 1% 1/8W 0603", Case/Package=0603, Max Operating Temperature=125°C, Min Operating Temperature=-55°C, Power Rating=100mW, Resistance=330R, Temperature Coefficient=25ppm/°C, Tolerance=0.5%, Composition="Thin Film", Contact Plating=Tin, Depth=0.85mm, Height=0.45mm, Lead Free="Lead Free", Length=1.55mm, Military Standard=Not, Mount="Surface Mount", Packaging="Tape and Reel", Radiation Hardening=No
R30: library part CMP-009-00014-5, "Chip Resistor, 1 KOhm, +/-1%, 0.1 W, -55 to 155 degC, 0603 (1608 Metric)", Case/Package=0603, Max Operating Temperature=155°C, Min Operating Temperature=-55°C, Power=100mW, Tolerance=1%, Voltage Rating=50V, Mounting Technology=SM, Pins=2, RoHS Compliant=True
R31: library part CMP-2000-00938-2, "RES SMD 18K OHM 0.1% 1/10W 0603", Case Code (Imperial)=0603, Case Code (Metric)=1608, Max Operating Temperature=155°C, Max Power Dissipation=100mW, Min Operating Temperature=-55°C, Package Quantity=1, Resistance=18kR, Resistance Tolerance=0.1%, Resistor Type="Thin Film", Temperature Coefficient=25ppm/°C, Voltage Rating=75V, Case/Package=0603, Construction=Rectangular, Contact Plating=Tin, Depth=0.8mm, Features="Automotive AEC-Q200", Height=0.45mm, Lead Free="Lead Free", Length=1.6mm, Military Standard=Not, Mount="Surface Mount", Number of Pins=2, Number of Terminations=2, Packaging="Tape and Reel", Power Rating=100mW, Radiation Hardening=No, REACH SVHC="No SVHC", RoHS Compliant=Yes, Series=ERA-3A, Size Code=0603, Technology="METAL FILM", Termination=SMD/SMT, Tolerance=0.1%, Voltage Rating (DC)=75V, Width=0.8mm
R32: library part CMP-2000-00945-2, "RES SMD 2K OHM 0.1% 1/10W 0603", Case Code (Imperial)=0603, Case Code (Metric)=1608, Max Operating Temperature=155°C, Max Power Dissipation=100mW, Min Operating Temperature=-55°C, Package Quantity=5000, Resistance=2kR, Resistance Tolerance=0.1%, Resistor Type="Thin Film", Temperature Coefficient=25ppm/°C, Voltage Rating=75V, Case/Package=0603, Construction=Rectangular, Contact Plating=Tin, Depth=0.8mm, Height=0.45mm, Lead Free="Lead Free", Length=1.6mm, Military Standard=Not, Mount="Surface Mount", Number of Pins=2, Number of Terminations=2, Packaging="Tape and Reel", Power Rating=100mW, Radiation Hardening=No, REACH SVHC="No SVHC", RoHS Compliant=Yes, Series=ERA-3A, Technology="THIN FILM", Termination=SMD/SMT, Tolerance=0.1%, Voltage Rating (DC)=75V, Width=0.8mm, Working Voltage=75V
R34 R35: library part CMP-03412-028997-1, "RES SMD 604K OHM 1% 1/10W 0603", Manufacturer=Yageo, Manufacturer Part Number=RT0603FRE07604KL, Package=RT0603, Power Rating=0.1W, Resistance=604KΩ, Temperature="-55°C to +155°C", Temperature Coefficient="50 ppm/°C", Temperature Range High=+155°C, Temperature Range Low=-55°C, Tolerance=0.01, Voltage Rating=75V, Automotive=No, Category=Res, ComponentLink2Description=Datasheet, ComponentLink2URL=http://www.yageo.com/documents/recent/PYu-RT_1-to-0.01_RoHS_L_9.pdf, Composition="Thin Film", Device Class L1="Passive Components", Device Class L2=Resistors, Device Class L3="Chip SMD Resistors", Digikey Description="RES SMD 604K OHM 1% 1/10W 0603", Footprint Url=http://www.yageo.com/exep/pages/download/literatures/PYu-R_Mount_10.pdf, Height=0.55mm, Ipc Land Pattern Name=RESC16080X45, Lead Free=Yes, Mouser Description="High Precision-High Stability Chip Resistor Thin Film 0603 604kOhm 1% Paper T/R", Octopart=https://octopart.com/rt0603fre07604kl-yageo-26041741, RoHS=TRUE, Series=RT
R36 R37 R38: library part CMP-2000-03706-1, "0603", Manufacturer="Vishay Dale", Part Number=TNPW060313K3BEEA
U1: library part CMP-12756-000035-1, "IC REG LINEAR 3.3V 600MA SOT25", Case/Package=SOT-23-5, Dropout Voltage=250mV, Max Input Voltage=6V, Max Operating Temperature=85°C, Max Output Current=600mA, Min Input Voltage=2.5V, Min Operating Temperature=-40°C, Output Voltage=3.3V, Package Quantity=1, Quiescent Current=55uA, Accuracy=1.5%, Height=1.3mm, Lead Free="Lead Free", Length=3.1mm, Mount="Surface Mount", Number of Outputs=1, Number of Pins=5, Number of Regulators=1, Output Current=600mA, Output Type=Fixed, Packaging="Tape and Reel", Polarity=Positive, Width=1.7mm
U2 U3 U4 U5: library part CMP-06317-000004-1, "IC PWR SWITCH N-CHAN 1:2 8SOIC", Case/Package=SOIC, Max Operating Temperature=85°C, Max Output Current=500mA, Min Operating Temperature=-40°C, On-State Resistance=90mR, Fault Protection="Over Temperature", Interface=On/Off, Lead Free="Lead Free", Number of Outputs=2, Number of Pins=8, Output Configuration="High Side", Packaging="Cut Tape", REACH SVHC="No SVHC"
U6: "https://www.monolithicpower.com/en/documentview/productdocument/index/version/2/document_type/Datasheet/lang/en/sku/MP2393GTL-Z/document_id/4270/"
U9: library part CMP-1685-00017-1, "Dual Operational Amplifier, 3 to 32 V, 0 to 70 degC, 8-Pin PDIP (P), Pb-Free (RoHS), Tube", Case Code (Imperial)=0603, Case Code (Metric)=1608, Colour=Orange, Forward Current="20 mA", Forward Voltage="2 V", Max Operating Temperature="85 degC", Min Operating Temperature="-55 degC", Package Quantity=3000, Power Rating="75 mW", Case\Package=0603, ComponentLink1Description="Manufacturer URL", ComponentLink1URL=http://www.ti.com/, ComponentLink2Description=Datasheet, ComponentLink2URL=http://www.ti.com/lit/ds/symlink/lm358a.pdf, ComponentLink3Description="Package Specification", ComponentLink3URL=http://www.ti.com/lit/ml/mpdi001b/mpdi001b.pdf, DatasheetVersion="SLOS068T, 04/2015", Height="1.1 mm", Illumination Colour=Orange, Length="1.6 mm", Lens Style=Diffused, Luminous Intensity="90 mcd", Mount="Surface Mount", Nominal Vf="2 V", PackageDescription="8-Pin Double In-line Package, Body 9.59 x 6.35 mm, Pitch 2.54 mm", PackageReference=P0008A, PackageVersion="4040082/E, 04/2010", Packaging="Tape and Reel", Pins=2, Radiation Hardening=No, RoHSCompliant=true, Viewing Angle="130 degrees", Width="0.8 mm"
U?: library part CMP-030-000000-1, "BSS138 - Logic-Level Translator Interface Evaluation Board", Package=None, Check_prices=https://www.snapeda.com/parts/BOB-12009/SparkFun/view-part/?ref=eda, Component Type=Standard, Design Item ID=BOB-12009, MF=SparkFun, MP=BOB-12009, Pin Count=12, SnapEDA_Link=https://www.snapeda.com/parts/BOB-12009/SparkFun/view-part/?ref=snap, Source=BOB-12009.SchLib
Y1: "No Description Available", Manufacturer_Name=Abracon, Copyright="Copyright (C) 2025 Ultra Librarian. All rights reserved.", Manufacturer_Part_Number=ABL-24.000MHZ-B2

## Via types
v1: diameter 0.5, hole 0.2, Top Layer to Bottom Layer, 16 vias
v2: diameter 3, hole 2, Top Layer to Bottom Layer, 1 vias

## Nets (pads, with @x,y where several pads share a name; then routed paths per layer and width w, separated by ;. In a path a pad name is that pad's centre, name@x,y a point inside that pad or via, vN(x,y) a via of type N, cw(c..) or ccw(c..) an arc to the next point about the centre after c; other vN are vias at no path point)
0.5V: R31.2 R32.2 U9.2
3.3V: C7.1 C9.1 C10.1 C13.2 C16.1 C17.2 C18.2 C19.2 C20.2 C21.2 IC1.5 IC1.10 IC1.52 IC1.57 IC1.64 R5.1 R6.1 R7.1 R8.1 R9.1 R10.1 R11.1 R12.1 R17.1 R18.2 R20.2 U1.5
3V3: J9.2 R30.2 U8.2
5V: C5.1 J1.4 R13.1 U1.1 U2.7 U3.7 U4.7 U5.7 U8.1 U?.HV
5V_ESC: IC2.16 J2A.A2 J2B.A2 J2C.A2 R31.1 U9.8
12V: C33.1 C34.2 J1.7 JTRIAL.1 R35.2 U6.2
+3.3: U?.LV
C3D: C32.1 IC2.1 U9.1
CFG_SEL0: IC1.41 R18.1
CFG_SEL1: IC1.42 R19.1
CFG_SEL2: IC1.13 R20.1
DN1.D+: IC1.2 UL.D+
DN1.D-: IC1.1 UL.D-
DN1.VBUS: C27.2 J1.11 R26.1 U2.8 UL.VIN
DN2.D+: ?.D+ IC1.4
DN2.D-: ?.D- IC1.3
DN2.VBUS: ?.VIN C24.2 J2C.A3 R23.1 U2.5 U?.HV3
DN3.D+: J6.3
DN3.D-: IC1.55 IC1.56 J6.2
DN3.VBUS: C26.2 J6.1 R25.1 U4.5
DN4.D+: IC1.54 J10.3
DN4.D-: IC1.53 J10.2
DN4.VBUS: C29.2 J10.1 R28.1 U4.8
DN5.D+: IC1.7 J7.3
DN5.D-: IC1.6 J7.2
DN5.VBUS: C28.2 J7.1 R27.1 U3.8
DN6.D+: IC1.9 J11.3
DN6.D-: IC1.8 J11.2
DN6.VBUS: C25.2 J11.1 R24.1 U3.5
DN7.D+: IC1.12
DN7.D-: IC1.11
DN7.VBUS: C30.2 R29.1 U5.8
GND: ?.GND1 ?.GND2 ?.GND3 C1.1 C2.1 C3.1 C4.1 C5.2 C6.1 C7.2 C8.2 C9.2 C10.2 C11.2 C12.2 C13.1 C14.1 C15.1 C16.2 C17.1 C18.1 C19.1 C20.1 C21.1 C22.1 C23.1 C24.1 C25.1 C26.1 C27.1 C28.1 C29.1 C30.1 C31.2 C32.2 C33.2 C34.1 C36.2 C37.2 C39.1 D9.1 D11.2 D12.2 D13.2 D14.2 D15.2 D16.2 D?.2 IC1.19 IC1.65 IC2.8 IC2.15 J1.1 J1.6 J1.8 J1.13 J2A.A1 J2B.A1 J2C.A1 J4.4 J6.4 J7.4 J10.4 J11.4 JTRIAL.2 R1.1 R2.1 R3.1 R4.1 R14.2 R16.1 R21.2 R32.1 R38.1 U1.2 U2.6 U3.6 U4.6 U5.6 U6.4 U8.3 U9.4 U?.GND_1 U?.GND_2 UL.GND1 UL.GND2 UL.GND3
  other v1: 47.88,56.389 48.98,56.389 50.08,56.389 51.18,56.389 47.88,57.489 48.98,57.489 50.08,57.489 51.18,57.489 47.88,58.589 48.98,58.589 50.08,58.589 51.18,58.589 47.88,59.689 48.98,59.689 50.08,59.689 51.18,59.689
IM1A.SIG: IC2.2 U10.1
IM1B.SIG: IC2.3 U?.HV2
IM1Y.SIG: IC2.4 J2B.A3
IM2A.SIG: IC2.5 U10.2
IM2B.SIG: IC2.6 U?.HV1
IM2Y.SIG: IC2.7 J2A.A3
IM3A.SIG: R33.1 U10.3
LEDA1: D2.1 IC1.51
LEDA2: D3.1 IC1.49
LEDA3: D4.1 IC1.47
LEDA4: D5.1 IC1.33
LEDA5: D6.1 IC1.31
LEDA6: D7.1 IC1.17
LEDA7: D8.1 IC1.15
LEDB1: D2.2 IC1.50
LEDB2: D3.2 IC1.48
LEDB3: D4.2 IC1.34
LEDB4: D5.2 IC1.32
LEDB5: D6.2 IC1.18
LEDB6: D7.2 IC1.16
LEDB7: D8.2 IC1.14
LOCAL_PWR: IC1.45 R12.2
Net?_2-OUT2: ?.2-OUT2 U?.LV3
Net?_14-A0/TX3/S-PFI_OUT: ?.14-A0/TX3/S-PFI_OUT U?.LV1
Net?_15-A1/RX3/S-PDIF_IN: ?.15-A1/RX3/S-PDIF_IN U?.LV2
Net?_22-A8/CTX1: ?.22-A8/CTX1 U8.6
Net?_23-A9/CRX1/CCLK1: ?.23-A9/CRX1/CCLK1 U8.8
NetC1_2: C1.2 J11.5 J11.6 J11.7 J11.8 R1.2
NetC2_2: C2.2 J10.5 J10.6 J10.7 J10.8 R2.2
NetC3_2: C3.2 J6.5 J6.6 J6.7 J6.8 R3.2
NetC4_2: C4.2 J7.5 J7.6 J7.7 J7.8 R4.2
NetC31_1: C31.1 R33.2 U9.3
NetC35_1: C35.1 R34.1
NetC35_2: C35.2 L1.2 U6.3
NetC36_1: C36.1 C37.1 C38.2 L1.1 R36.2
NetC38_1: C38.1 R36.1 R37.2 R38.2
NetC39_2: C39.2 U6.7
NetD2_3: D2.3 D2.4 R5.2
NetD3_3: D3.3 D3.4 R6.2
NetD4_3: D4.3 D4.4 R7.2
NetD5_3: D5.3 D5.4 R8.2
NetD6_3: D6.3 D6.4 R9.2
NetD7_3: D7.3 D7.4 R10.2
NetD8_3: D8.3 D8.4 R11.2
NetD9_2: D9.2 R19.2 R21.1
NetD11_1: D11.1 R24.2
NetD12_1: D12.1 R25.2
NetD13_1: D13.1 R26.2
NetD14_1: D14.1 R27.2
NetD15_1: D15.1 R28.2
NetD16_1: D16.1 R29.2
NetD17_1: D17.1 R30.1
NetD?_1: D?.1 R23.2
NetR13_2: R13.2 U1.3
NetR34_2: R34.2 U6.5
NetR35_1: R35.1 U6.6
NetR37_1: R37.1 U6.8
NetTP1_1: U8.7
NetU10_4: U10.4
NetU10_5: 
NetUL_1-TX1: UL.1-TX1
OCS1: IC1.28 U2.2
OCS2: IC1.27 U2.3
OCS3: IC1.22 U3.2
OCS4: IC1.21 U3.3
OCS5: IC1.35 U5.2
OCS6: IC1.38 U4.2
OCS7: IC1.37 U4.3
PRTPWR1: IC1.29 U2.1
PRTPWR2: IC1.26 U2.4
PRTPWR3: IC1.23 U3.1
PRTPWR4: IC1.20 U3.4
PRTPWR5: IC1.30 U5.1
PRTPWR6: IC1.39 U4.1
PRTPWR7: IC1.36 U4.4
PS0: J8.1 U8.10
PS1: J8.2 J9.1 U8.9
RBIAS: IC1.63 R14.1
RESET: C8.1 IC1.43 R17.2
SCL: ?.19-A5/SCL0 U8.5
SDA: ?.18-A4/SDA0 U8.4
UP.D+: IC1.59 J4.3
UP.D-: IC1.58 J4.2
UP.VBUS: C6.2 J4.1 R15.1
VBUS_DET: IC1.44 R15.2 R16.2
VDDAPLL: C12.1 C15.2 IC1.62
VDDCR: C11.1 C14.2 IC1.25
WIL2.RX: J1.2 UL.0-RX1
WIL2.TX: J1.3